# Allegro board 03v3.brd
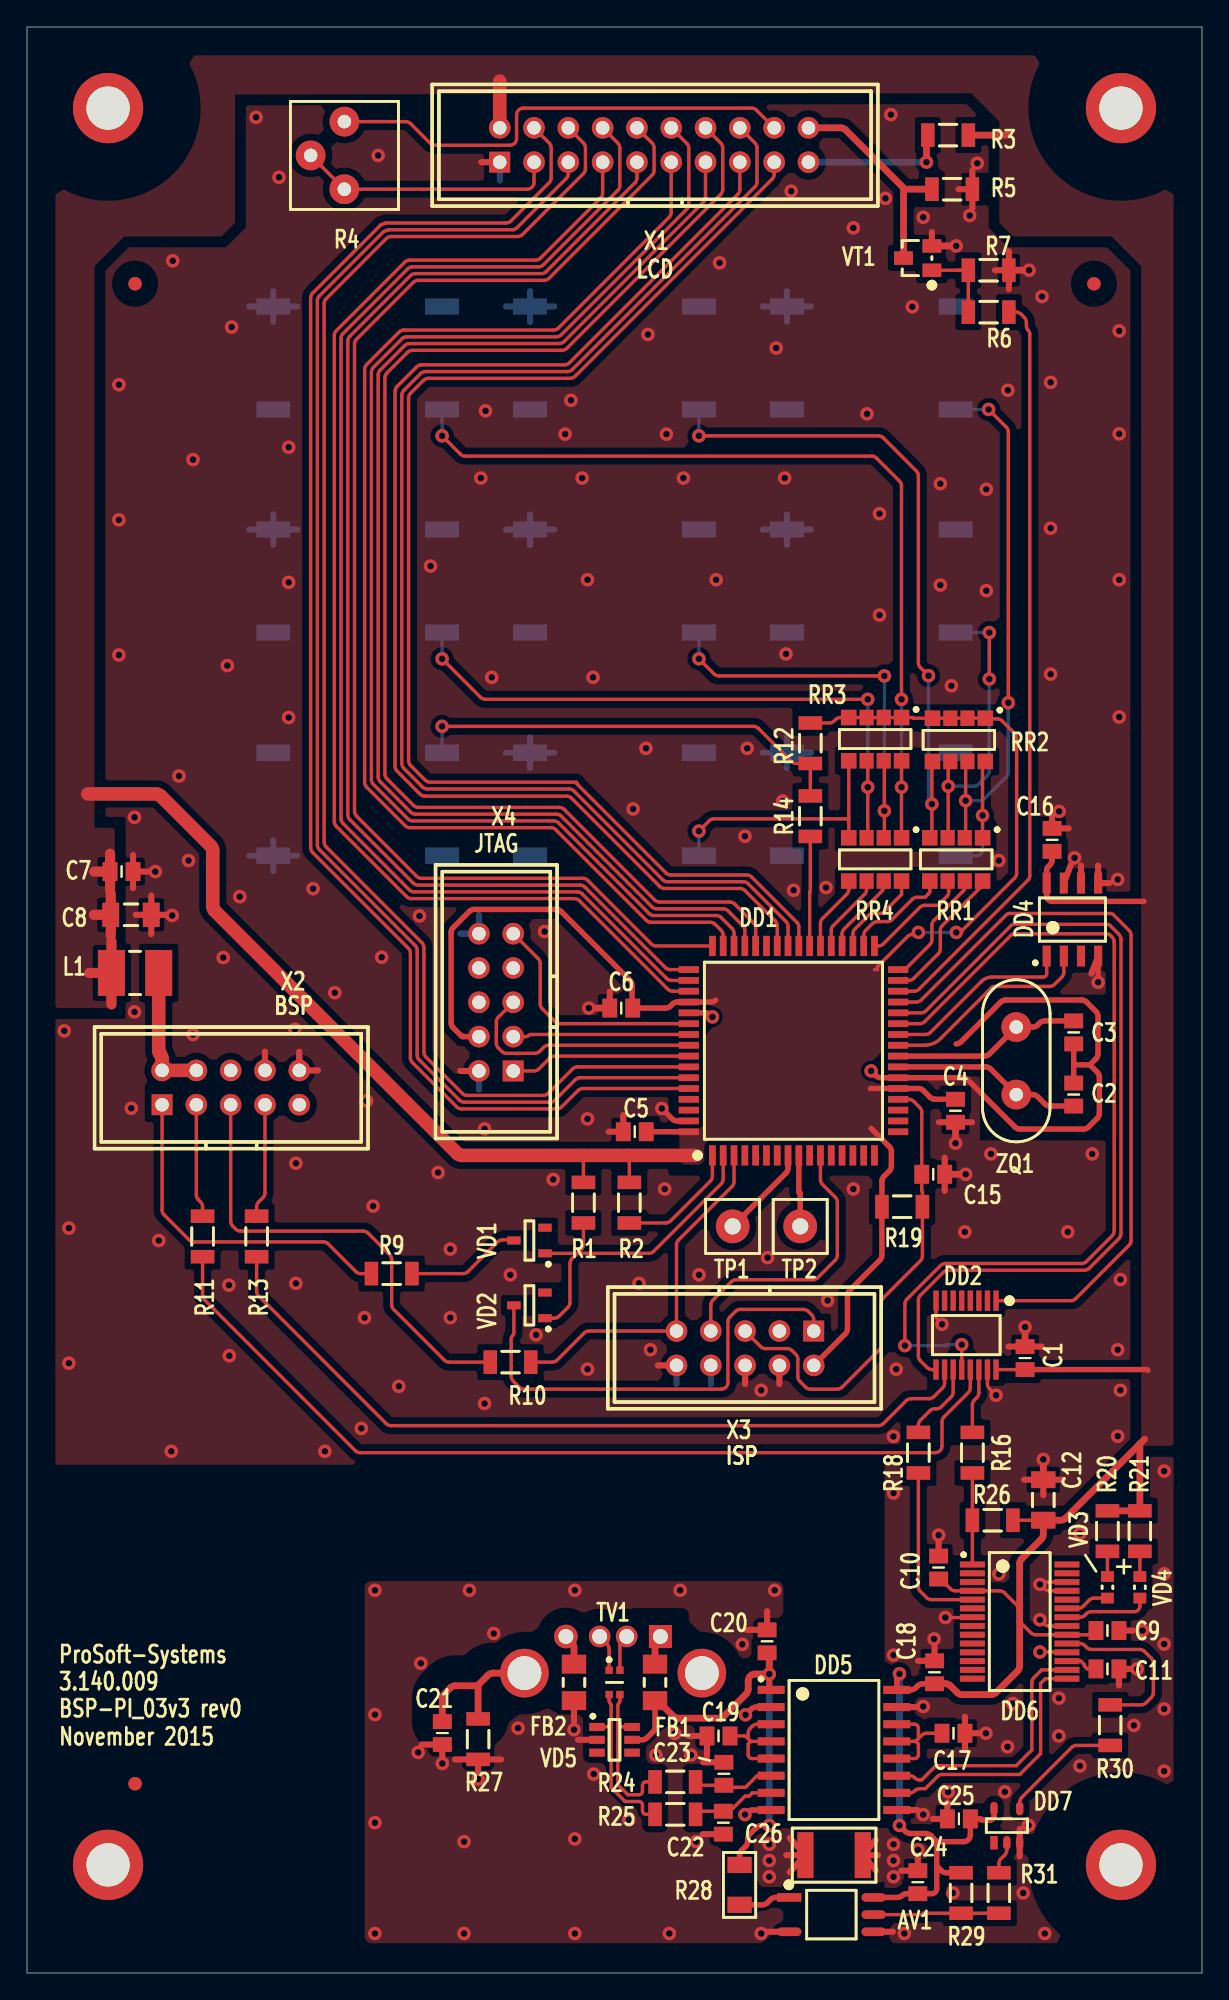
[diagram p0: board, top side]
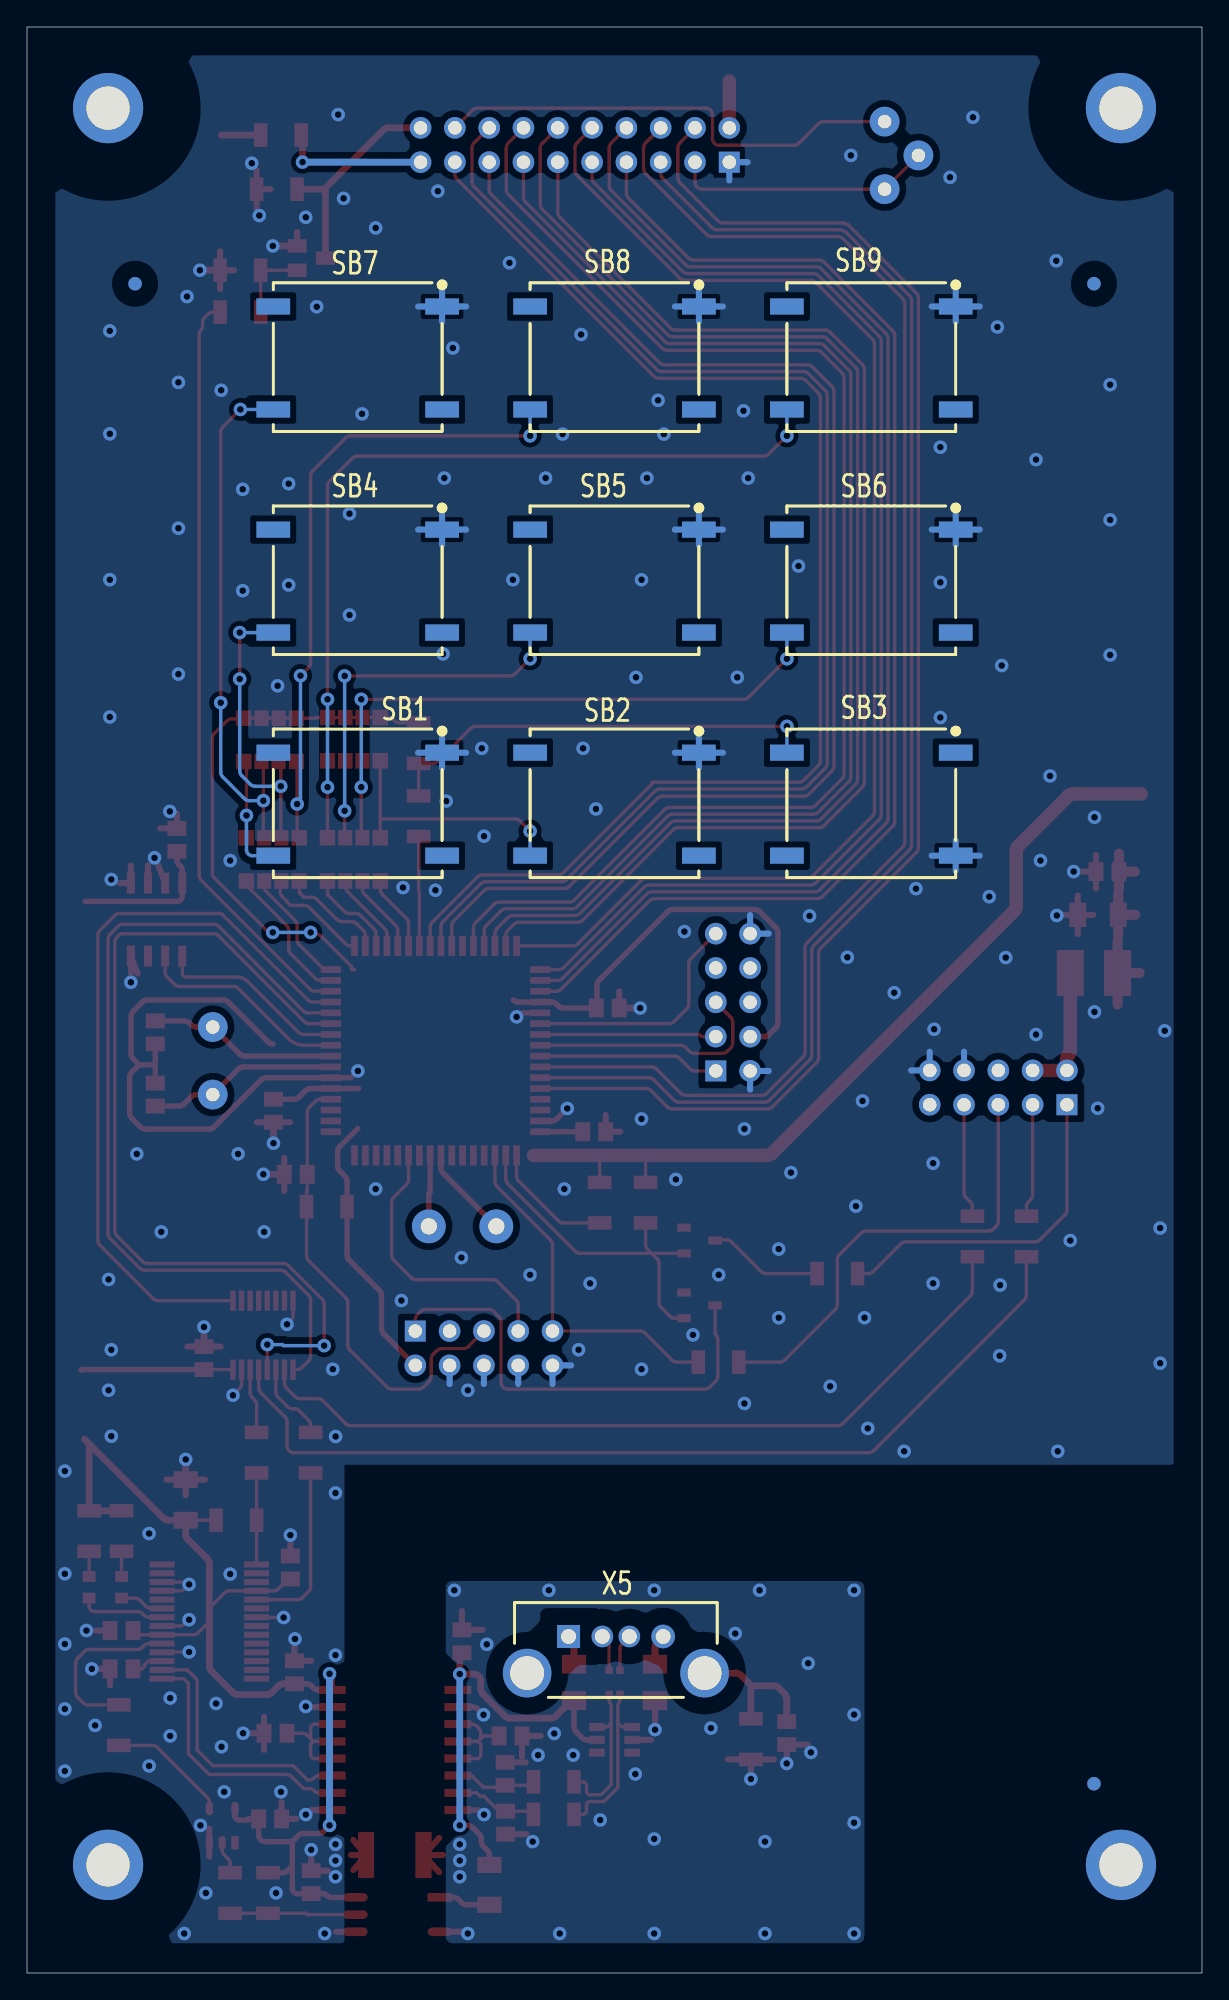
[diagram p1: board, bottom side, seen from below]

Outline 87 x 144 mm; copper layers: TOP, BOTTOM. Coordinates in mm from the lower left corner of the outline.
Outline path: 0,144 0,0 87,0 87,144 0,144

## Design rules (mm)
net group DP1: nets D+ D-
net group DP2: nets N115270 N115278
net group DP3: nets DD+ DD-
net group JTAG[0..3]: nets JTAG.TCK JTAG.TDI JTAG.TDO JTAG.TMS

## Placement (name value [footprint] x y rotation side)
AV1  ACPL-M50L-500E  [SOIC127P700X250-6N]  59.56 4.32 0 top
C1  0,1u  [CAPC2013X95N]  73.9 45.5 90 top
C2  22p  [CAPC2013X70N]  77.5 65 90 top
C3  22p  [CAPC2013X70N]  77.5 69.6 270 top
C4  0,1u  [CAPC2013X95N]  68.75 63.8 270 top
C5  0,1u  [CAPC2013X95N]  45 62.25 180 top
C6  0,1u  [CAPC2013X95N]  44 71.4 180 top
C7  0,1u  [CAPC2013X95N]  7 81.5 0 top
C8  10,0u  [CAPC3216X180N]  7.7 78.3 0 top
C9  0,1u  [CAPC2013X95N]  80 25.34 0 top
C10  0,1u  [CAPC2013X95N]  67.5 30 90 top
C11  0,1u  [CAPC2013X95N]  80 22.5 0 top
C12  10,0u  [CAPC3216X180N]  75.25 35 90 top
C15  0,1u  [CAPC2013X95N]  67.1 59.1 0 top
C16  0,1u  [CAPC2013X95N]  75.9 83.85 90 top
C17  0,1u  [CAPC2013X95N]  68.6 17.74 0 top
C18  0,1u  [CAPC2013X95N]  67.2 22.25 90 top
C19  0,1u  [CAPC2013X95N]  51.2 17.54 180 top
C20  0,1u  [CAPC2013X95N]  54.8 24.54 90 top
C21  4700p  [CAPC2013X70N]  30.75 17.75 90 top
C22  22p  [CAPC2013X70N]  51.56 11.12 90 top
C23  22p  [CAPC2013X70N]  51.6 14.74 270 top
C24  0,1u  [CAPC2013X95N]  65.96 6.72 90 top
C25  0,1u  [CAPC2013X95N]  69 11.4 180 top
C26  470pF  [CAPC4532X120N]  59.76 8.72 0 top
DD1  ATmega128  [TQFP80P1600X1600X120-64]  50.75 60.5 90 top
DD2  IDTQS3257Q  [SOP65P600X172-16]  71.75 49.75 270 top
DD4  TM75  [SOIC127P600X175-8N]  77.41 77.95 90 top
DD5  ADUM4160  [SOIC127P1032X265-16N]  59.75 16.5 0 top
DD6  FT232RL  [SOP65P780X200-28N]  73.5 26 0 top
DD7  SN74LVC1G14DBV  [SOT95P280X112-5N]  72.55 10.9 90 top
FB1  BLM31P  [FB3216X130N]  46.5 21.5 270 top
FB2  BLM31P  [FB3216X130N]  40.5 21.5 270 top
L1  10u  [INDC4532X280N]  8 74 0 top
NOREF  -  [unnamed]  8 14 0 top
NOREF#2  -  [#2]  50.6 20.4 0 top
NOREF#3  -  [#2]  36.2 27.5 0 top
NOREF#4  -  [unnamed#3]  81 138 0 top
NOREF#5  -  [unnamed]  79 125 0 top
NOREF#6  -  [#2]  36.2 20.4 90 top
NOREF#7  -  [#2]  81 8 90 top
NOREF#8  -  [unnamed]  8 125 0 top
NOREF#9  -  [unnamed#3]  6 8 0 top
NOREF#10  -  [unnamed#3]  6 138 0 top
NOREF#11  -  [unnamed#3]  81 8 0 top
NOREF#12  -  [unnamed]  79 125 180 bottom
NOREF#13  -  [unnamed]  8 14 180 bottom
NOREF#14  -  [unnamed]  8 125 180 bottom
R1  10k  [RESC3116X65N]  41.2 57 90 top
R2  10k  [RESC3116X65N]  44.6 57 90 top
R3  4,7  [RESC3116X65N]  68.2 136 0 top
R4  10k  [TRIM_PVC6A]  23.5 137 180 top
R5  0  [RESC3116X65N]  68.5 132 0 top
R6  100  [RESC3116X65N]  71.2 122.9 0 top
R7  10k  [RESC3116X65N]  71.2 126 180 top
R9  100  [RESC3116X65N]  27 51.75 180 top
R10  100  [RESC3116X65N]  35.8 45.2 180 top
R11  100  [RESC3116X65N]  13 54.5 90 top
R12  10k  [RESC3116X65N]  58 91 270 top
R13  100  [RESC3116X65N]  17 54.5 90 top
R14  100  [RESC3116X65N]  58 85.6 270 top
R16  100  [RESC3116X65N]  70 38.5 90 top
R18  100  [RESC3116X65N]  66 38.5 90 top
R19  10k  [RESC3116X65N]  64.8 56.7 180 top
R20  330  [RESC3116X65N]  80 32.7 90 top
R21  330  [RESC3116X65N]  82.4 32.7 90 top
R24  24  [RESC3116X65N]  48 14.14 0 top
R25  24  [RESC3116X65N]  48 11.74 0 top
R26  10k  [RESC3116X65N]  71.5 33.5 0 top
R27  1M  [RESC3116X65N]  33.4 17.3 270 top
R28  1k  [RESC3216X50N]  52.76 6.52 270 top
R29  10k  [RESC3116X65N]  69.16 5.92 90 top
R30  100  [RESC3116X65N]  80.2 18.34 90 top
R31  100  [RESC3116X65N]  71.96 5.92 90 top
RR1  100  [RESCAX127P320X508X70-8N]  68.8 82.4 270 top
RR2  10k  [RESCAX127P320X508X70-8N]  69 91.25 270 top
RR3  10k  [RESCAX127P320X508X70-8N]  62.8 91.3 270 top
RR4  100  [RESCAX127P320X508X70-8N]  62.8 82.4 270 top
SB1  3ESH9-15  [SW_3ES]  62.52 86.55 180 bottom
SB2  3ESH9-15  [SW_3ES]  43.5 86.55 180 bottom
SB3  3ESH9-15  [SW_3ES]  24.48 86.55 180 bottom
SB4  3ESH9-15  [SW_3ES]  62.52 103.06 180 bottom
SB5  3ESH9-15  [SW_3ES]  43.5 103.06 180 bottom
SB6  3ESH9-15  [SW_3ES]  24.48 103.06 180 bottom
SB7  3ESH9-15  [SW_3ES]  62.52 119.57 180 bottom
SB8  3ESH9-15  [SW_3ES]  43.5 119.57 180 bottom
SB9  3ESH9-15  [SW_3ES]  24.48 119.57 180 bottom
TP1  TP1_5mm  [P1_5MM]  52.25 55.25 0 top
TP2  TP1_5mm  [P1_5MM]  57.25 55.25 0 top
TV1  DLW21S  [DFN200X120X140-4RN]  43.5 21.5 270 top
VD1  BAT54S  [SOT95P230X110-3N]  37.2 54.2 180 top
VD2  BAT54S  [SOT95P230X110-3N]  37.2 49.4 180 top
VD3  green  [LEDC1608X110N]  80 28.54 90 top
VD4  green  [LEDC1608X110N]  82.4 28.54 90 top
VD5  NUP2201MR6  [SOP95P275X110-6N]  43.5 17.25 0 top
VT1  IRLML2803  [SOT95P245X110-3]  67 126 90 top
X1  LCD  [IDC_20M]  46.43 135.27 90 top
X2  BSP  [IDC_10M]  15.08 65.52 90 top
X3  ISP  [IDC_10M]  53.17 46.23 270 top
X4  IDC-10M  [IDC_10M]  34.73 71.83 180 top
X5  USBA  [CON_USB_A_VERT]  43.4 23.9 90 bottom
ZQ1  16.0 MHz  [HC_49]  73.25 65 0 top

## Library data of the parts
AV1 = ACPL-M50L
C1-C12 C15-C25 = CAP_NP
C26 = CAPACITOR
DD1 = ATmega128-16AU_0
DD2 = IDTQS3257Q_0
DD4 = TMP75
DD5 = ADuM4160_RW16
DD6 = FT232_SSOP28
DD7 = SN74LVC1G14_v1
FB1 FB2 = FERRITE
L1 = INDUCTOR
R1-R3 R5-R7 R9-R14 R16 R18-R21 R24-R27 R29-R31 = RES_0.25W
R4 = RES_P
R28 = R_0.25W
RR1-RR4 = RES_ARRAY_4
SB1-SB9 = BUTTON_3ESH9
TP1 TP2 = TP1_5mm
TV1 = COMMON_CHOKE
VD1 VD2 = DIODE_DUAL_1
VD3 VD4 = DIODE_LED
VD5 = TVS_ARRAY_NUP2201
VT1 = IRLML2803
X1 = CON_20
X2-X4 = CON_10
X5 = CON_6
ZQ1 = KX-3H_16MHz

## Footprints (pads in the part's own frame, mm; a bottom-side part is the same pattern mirrored in y, then rotated)
CAPC2013X70N
  rect 1.1x1.4 smd: 1(-0.85,0) 2(0.85,0)
CAPC2013X95N
  rect 1.1x1.4 smd: 1(-0.85,0) 2(0.85,0)
CAPC3216X180N
  rect 1.25x1.8 smd: 1(-1.5,0) 2(1.5,0)
CAPC4532X120N
  rect 1.2x3.4 smd: 1(-2.125,0) 2(2.125,0)
CON_USB_A_VERT
  rect 1.7x1.7 hole 1.1: 1(1,3.5)
  round 1.6 hole 1.1: 2(1,1) 3(1,-1)
  round 1.75 hole 1.1: 4(1,-3.5)
  round 3.6 hole 2.5: 5(-1.71,-6.57) 6(-1.71,6.57)
DFN200X120X140-4RN
  rect 0.55x0.55 smd: 1(-0.9,-0.4) 2(0.9,-0.4) 3(0.9,0.4) 4(-0.9,0.4)
FB3216X130N
  rect 1.4x1.8 smd: 1(-1.35,0) 2(1.35,0)
HC_49
  round 2.2 hole 1: 1(0,0) 2(0,5)
IDC_10M
  rect 1.55x1.55 hole 1: 1(-1.27,5.08)
  round 1.6 hole 1: 2(1.27,5.08) 3(-1.27,2.54) 4(1.27,2.54) 5(-1.27,0) 6(1.27,0) 7(-1.27,-2.54) 8(1.27,-2.54) 9(-1.27,-5.08) 10(1.27,-5.08)
IDC_20M
  rect 1.55x1.55 hole 1: 1(-1.27,11.43)
  round 1.6 hole 1: 2(1.27,11.43) 3(-1.27,8.89) 4(1.27,8.89) 5(-1.27,6.35) 6(1.27,6.35) 7(-1.27,3.81) 8(1.27,3.81) 9(-1.27,1.27) 10(1.27,1.27) 11(-1.27,-1.27) 12(1.27,-1.27) 13(-1.27,-3.81) 14(1.27,-3.81) 15(-1.27,-6.35) 16(1.27,-6.35) 17(-1.27,-8.89) 18(1.27,-8.89) 19(-1.27,-11.43) 20(1.27,-11.43)
INDC4532X280N
  rect 2x3.4 smd: 1(-1.75,0) 2(1.75,0)
LEDC1608X110N
  rect 0.8x0.95 smd: A(0.8,0) C(-0.8,0)
P1_5MM
  round 2.5 hole 1.2: 1(0,0)
RESC3116X65N
  rect 1x1.75 smd: 1(-1.5,0) 2(1.5,0)
RESC3216X50N
  rect 1.2x1.8 smd: 1(-1.475,0) 2(1.475,0)
RESCAX127P320X508X70-8N
  rect 1.15x1.15 smd: 1(-1.6,1.955) 4(-1.6,-1.955) 5(1.6,-1.955) 8(1.6,1.955)
  rect 1.15x1.05 smd: 2(-1.6,0.635) 3(-1.6,-0.635) 6(1.6,-0.635) 7(1.6,0.635)
SOIC127P600X175-8N
  rect 1.55x0.6 smd: 1(-2.7,1.905) 2(-2.7,0.635) 3(-2.7,-0.635) 4(-2.7,-1.905) 5(2.7,-1.905) 6(2.7,-0.635) 7(2.7,0.635) 8(2.7,1.905)
SOIC127P700X250-6N
  rect 1.8x0.64 smd: 1(-3.125,1.27)
  oval 1.8x0.64 smd: 3(-3.125,-1.27) 4(3.125,-1.27) 5(3.125,0) 6(3.125,1.27)
SOIC127P1032X265-16N
  rect 2x0.6 smd: 1(-4.65,4.445) 2(-4.65,3.175) 3(-4.65,1.905) 4(-4.65,0.635) 5(-4.65,-0.635) 6(-4.65,-1.905) 7(-4.65,-3.175) 8(-4.65,-4.445) 9(4.65,-4.445) 10(4.65,-3.175) 11(4.65,-1.905) 12(4.65,-0.635) 13(4.65,0.635) 14(4.65,1.905) 15(4.65,3.175) 16(4.65,4.445)
SOP65P600X172-16
  rect 1.5x0.4 smd: 1(0,0) 2(0,-0.635) 3(0,-1.27) 4(0,-1.905) 5(0,-2.54) 6(0,-3.175) 7(0,-3.81) 8(0,-4.445) 9(5.1,-4.445) 10(5.1,-3.81) 11(5.1,-3.175) 12(5.1,-2.54) 13(5.1,-1.905) 14(5.1,-1.27) 15(5.1,-0.635) 16(5.1,0)
SOP65P780X200-28N
  rect 1.85x0.45 smd: 1(-3.5,4.225) 2(-3.5,3.575) 3(-3.5,2.925) 4(-3.5,2.275) 5(-3.5,1.625) 6(-3.5,0.975) 7(-3.5,0.325) 8(-3.5,-0.325) 9(-3.5,-0.975) 10(-3.5,-1.625) 11(-3.5,-2.275) 12(-3.5,-2.925) 13(-3.5,-3.575) 14(-3.5,-4.225) 15(3.5,-4.225) 16(3.5,-3.575) 17(3.5,-2.925) 18(3.5,-2.275) 19(3.5,-1.625) 20(3.5,-0.975) 21(3.5,-0.325) 22(3.5,0.325) 23(3.5,0.975) 24(3.5,1.625) 25(3.5,2.275) 26(3.5,2.925) 27(3.5,3.575) 28(3.5,4.225)
SOP95P275X110-6N
  rect 1.15x0.6 smd: 1(-1.3,0.95) 2(-1.3,0) 3(-1.3,-0.95) 4(1.3,-0.95) 5(1.3,0) 6(1.3,0.95)
SOT95P230X110-3N
  rect 1x0.6 smd: 1(-1.15,0.95) 2(-1.15,-0.95) 3(1.15,0)
SOT95P245X110-3
  rect 1x1.4 smd: 1(0,0) 2(1.8,0) 3(0.9,2.1)
SOT95P280X112-5N
  rect 1x0.55 smd: 1(-1.262,0.95)
  oval 1x0.55 smd: 2(-1.262,0) 3(-1.262,-0.95) 4(1.262,-0.95) 5(1.262,0.95)
SW_3ES
  rect 2.5x1.2 smd: 1(6.25,3.75) 2(-6.25,3.75) 3(6.25,-3.87) 4(-6.25,-3.87)
TQFP80P1600X1600X120-64
  rect 1.5x0.5 smd: 1(0,0) 2(0,-0.8) 3(0,-1.6) 4(0,-2.4) 5(0,-3.2) 6(0,-4) 7(0,-4.8) 8(0,-5.6) 9(0,-6.4) 10(0,-7.2) 11(0,-8) 12(0,-8.8) 13(0,-9.6) 14(0,-10.4) 15(0,-11.2) 16(0,-12) 33(15.5,-12) 34(15.5,-11.2) 35(15.5,-10.4) 36(15.5,-9.6) 37(15.5,-8.8) 38(15.5,-8) 39(15.5,-7.2) 40(15.5,-6.4) 41(15.5,-5.6) 42(15.5,-4.8) 43(15.5,-4) 44(15.5,-3.2) 45(15.5,-2.4) 46(15.5,-1.6) 47(15.5,-0.8) 48(15.5,0)
  rect 0.5x1.5 smd: 17(1.75,-13.75) 18(2.55,-13.75) 19(3.35,-13.75) 20(4.15,-13.75) 21(4.95,-13.75) 22(5.75,-13.75) 23(6.55,-13.75) 24(7.35,-13.75) 25(8.15,-13.75) 26(8.95,-13.75) 27(9.75,-13.75) 28(10.55,-13.75) 29(11.35,-13.75) 30(12.15,-13.75) 31(12.95,-13.75) 32(13.75,-13.75) 49(13.75,1.75) 50(12.95,1.75) 51(12.15,1.75) 52(11.35,1.75) 53(10.55,1.75) 54(9.75,1.75) 55(8.95,1.75) 56(8.15,1.75) 57(7.35,1.75) 58(6.55,1.75) 59(5.75,1.75) 60(4.95,1.75) 61(4.15,1.75) 62(3.35,1.75) 63(2.55,1.75) 64(1.75,1.75)
TRIM_PVC6A
  round 2.2 hole 1: 1(0,0) 2(2.5,2.5) 3(0,5)
unnamed
  round 1 smd: (0,0)
unnamed#3
  round 5.2 hole 3.2: 1(0,0)

## Nets
GND: AV1.4(GND) C1.2 C2.2 C3.2 C4.2 C5.2 C6.2 C7.2 C8.2 C9.2 C10.2 C11.2 C12.2 C15.2 C16.2 C17.2 C18.2 C24.2 C25.2 C26.2 DD1.22(GND#0) DD1.53(GND#1) DD1.63(GNDA) DD2.8(GND) DD2.15(E\) DD4.4(GND) DD4.5(A2) DD4.6(A1) DD4.7(A0) DD5.9(GND2#2) DD5.15(GND2#1) DD6.7(GND#1) DD6.18(GND#2) DD6.21(GND#3) DD6.25(AGND) DD6.26(TEST) DD7.3(GND) R5.2 R7.1 SB1.1 SB2.1 SB3.3(4) SB4.1 SB5.1 SB6.1 SB7.1 SB8.1 SB9.1 VT1.2(S) X1.1 X2.8 X2.10 X3.4 X3.6 X3.8 X3.10 X4.2 X4.10
GNDE: AV1.3(CATHODE) C19.2 C20.2 C21.1 C22.1 C23.1 C26.1 DD5.2(GND1#1) DD5.8(GND1#2) FB2.2 R27.2 VD5.2(VN)
#RES: C15.1 DD1.20(R\E\S\) R19.1 X3.5
+5B: AV1.6(VCC) C1.1 C4.1 C5.1 C6.1 C7.1 C8.1 C9.1 C10.1 C12.1 C16.1 C18.1 C24.1 C25.1 DD1.21(+5B#0) DD1.52(+5B#1) DD1.64(+5BA) DD2.16(VCC) DD4.8(VCC) DD5.16(VBUS2) DD6.4(VCCIO) DD6.20(VCC) DD7.5(VCC) L1.1 R1.2 R2.2 R3.2 R12.1 R19.2 R20.2 R21.2 R26.2 R29.2 RR2.1 RR2.2 RR2.3 RR2.4 RR3.1 RR3.2 RR3.3 RR3.4 X1.2 X3.2 X4.4
+5BE: C20.1 DD5.1(VBUS1) FB1.2 R28.1 VD5.5(VP)
CS1: DD1.42(PC7/A15) X1.15
CS2: DD1.41(PC6/A14) X1.16
D+: R25.1 TV1.2 VD5.1(I/01)
D-: R24.1 TV1.3 VD5.6(I/O2)
D_I: DD1.60(PF1/ADC1) X1.4
DB0: DD1.51(PA0/AD0) X1.7
DB1: DD1.50(PA1/AD1) X1.8
DB2: DD1.49(PA2/AD2) X1.9
DB3: DD1.48(PA3/AD3) X1.10
DB4: DD1.47(PA4/AD4) X1.11
DB5: DD1.46(PA5/AD5) X1.12
DB6: DD1.45(PA6/AD6) X1.13
DB7: DD1.44(PA7/AD7) X1.14
DD+: DD5.10(DD+) DD6.15(USBDP)
DD-: DD5.11(DD-) DD6.16(USBDM)
E: DD1.58(PF3/ADC3) X1.6
JTAG.TCK: DD1.57(PF4/TCK) X4.1
JTAG.TDI: DD1.54(PF7/TDI) X4.9
JTAG.TDO: DD1.55(PF6/TDO) X4.3
JTAG.TMS: DD1.56(PF5/TMS) X4.5
K1: RR1.1 RR2.8 SB1.4
K2: RR1.2 RR2.7 SB7.4
K3: RR1.3 RR2.6 SB4.4
K4: RR1.4 RR2.5 SB8.4
K5: RR3.8 RR4.1 SB9.4
K6: RR3.7 RR4.2 SB5.4
K7: RR3.6 RR4.3 SB6.4
K8: RR3.5 RR4.4 SB2.4
K9: R12.2 R14.1 SB3.2(1)
KEY1: DD1.31(PD6/T1) RR1.8
KEY2: DD1.32(PD7/T2) RR1.7
KEY3: DD1.33(PG0/W\R\) RR1.6
KEY4: DD1.34(PG1/R\D\) RR1.5
KEY5: DD1.35(PC0/A8) RR4.8
KEY6: DD1.36(PC1/A9) RR4.7
KEY7: DD1.37(PC2/A10) RR4.6
KEY8: DD1.38(PC3/A11) RR4.5
KEY9: DD1.39(PC4/A12) R14.2
LED: DD1.30(PD5/XCK1) R6.2
LRST: DD1.40(PC5/A13) X1.17
MUX: DD1.29(ICP1/PD4) DD2.1(S)
R_W: DD1.59(PF2/ADC2) X1.5
RXD0/MOSI: DD1.2(RXD0/PE0) R1.1 VD1.1(A) VD2.1(A)
RXD1: DD1.27(RXD1/PD2) DD2.12(OUTD)
RXD_LS: DD2.13(IN1D) R11.1
SCK: DD1.11(SCK/PB1) X3.7
SCL: DD1.25(SCL/PD0) DD4.2(SCL)
SDA: DD1.26(SDA/PD1) DD4.1(SDA)
TXD0/MISO: DD1.3(TXD0/PE1) R10.1 X3.9
TXD1: DD1.28(TXD1/PD3) DD2.9(OUTC)
TXD_LS: DD2.10(IN1C) R13.1
N00957: DD1.1(P\E\N\) R2.1
N01084: DD1.8(T3/PE6) TP1.1
N01088: DD1.9(ICP3/PE7) TP2.1
N01310: C3.1 DD1.24(XTAL1) ZQ1.2
N01324: C2.1 DD1.23(XTAL2) ZQ1.1
N93659: R4.2(MID) R4.3(OUT) X1.3
N93746: R4.1(IN) X1.18
N93998: R5.1 VT1.3(D) X1.20
N94028: R6.1 R7.2 VT1.1(G)
N94170: R3.1 X1.19
N100167: DD2.11(IN0C) R18.2
N100189: DD2.14(IN0D) R16.2
N115270: C22.2 DD5.7(UD+) R25.2
N115278: C23.2 DD5.6(UD-) R24.2
N115358: FB1.1 X5.1
N115370: FB2.1 X5.4
N115422: TV1.1 X5.3
N115426: TV1.4 X5.2
N115490: C17.1 DD5.12(PIN) DD5.13(SPD) DD5.14(VDD2)
N115638: C19.1 DD5.3(VDD1) DD5.4(PDEN) DD5.5(SPU)
N116441: DD6.1(TXD) R16.1 R26.1
N116513: C11.1 DD6.17(3V3OUT)
N116637: DD6.5(RXD) R18.1
N116697: DD6.22(CBUS1) VD4.C
N116729: DD6.23(CBUS0) VD3.C
N116753: R20.1 VD3.A
N116773: R21.1 VD4.A
N134788: C21.2 R27.1 X5.5
N164718: AV1.1(ANODE) R28.2
N166181: DD7.4(OUT) R30.1
N168079: DD7.2(IN1) R31.2
N169875: DD6.19(R\E\S\E\T\) R30.2
N170831: AV1.5(VO) R29.1 R31.1
N172116: VD2.3(M) X3.1
N172976: R9.2 X2.1
N172980: L1.2 X2.2 X2.4
N173418: R10.2 X2.5
N173516: R11.2 X2.3
N173528: R13.2 X2.7
N177903: R9.1 VD1.3(M)

Pads without a net: DD1 4 5 6 7 10 12 13 14 15 16 17 18 19 43 61 62; DD2 2 3 4 5 6 7; DD4 3; DD6 2 3 6 8 9 10 11 12 13 14 24 27 28; DD7 1; NOREF#4 1; NOREF#9 1; NOREF#10 1; NOREF#11 1; SB1 2 3; SB2 2 3; SB3 1 4; SB4 2 3; SB5 2 3; SB6 2 3; SB7 2 3; SB8 2 3; SB9 2 3; VD1 2; VD2 2; VD5 3 4; X2 6 9; X3 3; X4 6 7 8; X5 6

## Via types
v1: diameter 1, hole 0.5, TOP to BOTTOM, 238 vias

## Routing (per net, layer and track width the routed paths; a pad name or vN(x,y) marks a point on that pad's centre or on a via; arc(x,y) is an arc through that point)
GND: length 224
  TOP w0.25: v1(75,23.75) 76.97,23.75 DD6.18 ; v1(68,26.3) 69.97,26.3 DD6.7 ; DD6.21 75.67,25.68 arc(75.48,25.72) 75.32,25.82 v1(75,26.14) ; v1(67.75,48) 67.45,48.3 arc(67.34,48.46) 67.3,48.65 DD2.8 ; DD6.26 75.38,28.93 arc(75.19,28.89) 75.03,28.78 v1(75,28.75) 75.33,28.42 arc(75.49,28.32) 75.68,28.28 DD6.25 ; v1(71.75,42.75) 71.26,43.24 arc(71.15,43.4) 71.11,43.59 DD2.15
  TOP w0.4: v1(62.5,66.75) 62.85,66.4 arc(63.02,66.29) 63.21,66.25 DD1.22 69.29,66.25 arc(69.48,66.21) 69.65,66.1 73.16,62.59 arc(73.32,62.49) 73.51,62.45 78.24,62.45 arc(78.43,62.49) 78.59,62.59 79.25,63.26 arc(79.36,63.42) 79.4,63.61 79.4,66.3 arc(79.36,66.49) 79.25,66.65 78.7,67.2 ; DD1.53 50.24,71.05 arc(50.43,71.01) 50.6,70.9 v1(50.75,70.75) ; 78.7,67.2 79.15,67.66 arc(79.26,67.82) 79.3,68.01 79.3,70.8 arc(79.26,70.99) 79.15,71.15 78.45,71.85 arc(78.29,71.96) 78.1,72 72.46,72 arc(72.27,71.96) 72.1,71.85 69.15,68.9 arc(68.98,68.79) 68.79,68.75 ; 78.7,67.2 77.5,67.2 ; 77.5,65.85 77.5,67.2 ; 77.5,67.2 C3.2 ; DD4.4 v1(79.31,73.31) ; DD1.63 48.13,63.05 arc(47.94,63.09) 47.78,63.2 v1(47,63.97)
  TOP w0.45: 53.17,43.58 X3.6 ; R7.1 72.7,127.41 ; R7.1 71.67,126 ; R7.1 72.7,124.6 ; 67.95,57.87 C15.2 67.95,60.33 ; 61.88,8.72 62.84,9.83 ; 61.88,8.72 62.84,7.61 ; 61.88,8.72 63.01,8.72 ; 65.97,23.1 C18.2 67.2,24.18 ; 68.15,12.63 C25.2 67.07,11.4 ; 72.67,46.35 C1.2 75.13,46.35 ; X2.8 17.62,68.17 ; 33.65,134 X1.1 ; 80.14,80.65 DD4.5 79.31,81.95 ; 46.71,44.96 X3.10 ; 55.71,43.58 X3.4 ; 70,130.6 R5.2 ; R5.2 68.97,132 ; R5.2 70,133.4 ; DD4.7 77.28,81.95 ; VT1.2 67,128.83 ; 73.5,8.61 DD7.3 73.5,10.67 ; 64.73,7.57 C24.2 65.96,8.65 ; 62.69,3.05 64.11,3.05 ; C6.2 43.15,72.63 ; 32.08,66.75 X4.2 ; 73.82,36.5 C12.2 ; C12.2 76.68,36.5 ; C12.2 75.25,35.35 ; 43.07,62.25 C5.2 44.15,63.48 ; C8.2 10.35,78.3 ; C8.2 8.05,78.3 ; C8.2 9.2,79.73 ; C8.2 9.2,76.87 ; DD5.9 65.93,12.06 ; 7.85,80.27 C7.2 ; C7.2 8.93,81.5 ; C7.2 7.85,82.73 ; 69.98,62.95 C4.2 67.52,62.95 ; DD4.6 78.04,81.95 ; 77.13,84.7 C16.2 75.9,85.78 ; 81.93,22.5 C11.2 80.85,21.27 ; C9.2 81.93,25.34 ; C17.2 69.45,18.97 ; C17.2 70.53,17.74 ; C17.2 69.45,16.51 ; 20.16,68.17 X2.10 21.54,66.79 ; DD5.15 65.93,19.68 ; C10.2 67.5,31.93 ; 78.81,73.95 DD4.4
  TOP w0.5: C4.2 v1(68.75,61.4) ; 10.7,78.3 v1(10.75,78.25) ; C1.2 v1(73.9,47.8) ; v1(68.8,127.8) VT1.2 ; R7.1 v1(74.2,126) ; C12.2 v1(75.25,38) ; C15.2 v1(69.5,59.1) ; C6.2 v1(41.6,71.4)
  BOTTOM w0.45: 21.54,66.79 X2.10 20.16,68.17 ; 33.46,65.37 X4.2 32.08,66.75 ; SB3.3 20.01,82.68 ; SB3.3 18.23,83.81 ; SB3.3 18.23,81.55 ; SB3.3 16.45,82.68 ; 54.49,123.32 SB7.1 ; SB7.1 56.27,124.45 ; SB7.1 56.27,122.19 ; SB7.1 58.05,123.32 ; 56.27,89.17 SB1.1 ; SB1.1 58.05,90.3 ; SB1.1 54.49,90.3 ; SB1.1 56.27,91.43 ; 32.08,76.91 X4.10 33.46,78.29 ; 48.09,43.58 X3.10 46.71,44.96 ; 35.47,106.81 SB5.1 ; SB5.1 37.25,107.94 ; SB5.1 37.25,105.68 ; SB5.1 39.03,106.81 ; 37.25,89.17 SB2.1 ; SB2.1 39.03,90.3 ; SB2.1 37.25,91.43 ; SB2.1 35.47,90.3 ; 33.65,134 X1.1 35,132.65 ; SB4.1 56.27,107.94 ; SB4.1 54.49,106.81 ; SB4.1 56.27,105.68 ; SB4.1 58.05,106.81 ; 18.23,105.68 SB6.1 ; SB6.1 16.45,106.81 ; SB6.1 20.01,106.81 ; SB6.1 18.23,107.94 ; 53.17,43.58 X3.6 ; 50.63,43.58 X3.8 ; SB9.1 20.01,123.32 ; SB9.1 16.45,123.32 ; SB9.1 18.23,124.45 ; SB9.1 18.23,122.19 ; X2.8 17.62,68.17 ; SB8.1 37.25,124.45 ; SB8.1 37.25,122.19 ; SB8.1 35.47,123.32 ; SB8.1 39.03,123.32 ; 55.71,43.58 X3.4
  vias: v1(2.76,69.72) v1(3.1,55.12) v1(3.1,45.12) v1(6.8,117.53) v1(6.8,107.53) v1(6.8,97.53) v1(7.72,63.99) v1(7.96,85.52) v1(7.96,71.12) v1(9.5,81.5) v1(9.75,54.2) v1(10.68,38.6) v1(10.79,126.7) v1(11.25,88.58) v1(11.96,82.32) v1(12.29,111.99) v1(12.29,69.44) v1(14.53,75.14) v1(14.83,96.75) v1(14.95,50.9) v1(14.98,45.67) v1(15.15,121.8) v1(15.75,79.65) v1(16.96,137.32) v1(18.65,132.88) v1(19.37,112.91) v1(19.37,102.91) v1(19.37,92.91) v1(19.83,69.84) v1(19.91,59.92) v1(19.91,51.03) v1(21.18,80.24) v1(22.05,38.6) v1(22.79,72.54) v1(24.75,40.3) v1(24.99,48.49) v1(25.14,64.53) v1(25.62,56.75) v1(26,134.5) v1(26.26,75.16) v1(27.53,43.41) v1(29.06,78.22) v1(29.88,104.11) v1(30.44,59.23) v1(31.34,53.57) v1(31.34,48.49) v1(33.6,110.62) v1(33.88,62.46) v1(33.88,42.14) v1(33.95,115.6) v1(34.41,95.88) v1(35.78,51.67) v1(37.69,47.22) v1(38.33,77.06) v1(38.96,58.72) v1(39.84,113.88) v1(40.27,116.38) v1(41.1,110.62) v1(41.5,103.1) v1(41.5,63.2) v1(41.5,44.68) v1(41.91,95.88) v1(44.88,86.14) v1(45.31,51.03) v1(45.83,90.62) v1(45.97,121.25) v1(46.16,46.12) v1(47.22,58.02) v1(47.34,113.88) v1(48.6,110.62) v1(49.75,51.67) v1(51.02,103.1) v1(51.28,126.55) v1(53.16,84.12) v1(53.33,90.62) v1(54.36,43.12) v1(54.84,52.94) v1(55.47,120.25) v1(55.96,86.72) v1(56.1,110.62) v1(56.2,97.61) v1(56.58,131.85) v1(56.76,80.12) v1(59.16,80.32) v1(59.28,49.76) v1(61.19,129.13) v1(61.19,58.02) v1(62.19,115.38) v1(63.12,107.99) v1(63.12,100.49) v1(63.56,131.32) v1(63.96,137.52) v1(64.15,39.7) v1(64.16,35.52) v1(64.16,23.52) v1(64.16,9.52) v1(64.16,8.32) v1(64.16,7.12) v1(64.36,44.68) v1(64.96,2.92) v1(65.55,123.3) v1(65.96,9.12) v1(66.36,129.92) v1(66.36,19.72) v1(66.36,11.72) v1(67.16,24.72) v1(67.5,32.4) v1(67.63,110.21) v1(67.63,102.71) v1(68.2,13.4) v1(68.44,95.25) v1(68.56,5.92) v1(69.44,54.84) v1(69.8,130.05) v1(70.36,133.92) v1(71,17.74) v1(71.03,109.79) v1(71.03,102.29) v1(71.37,60.61) v1(71.96,82.32) v1(71.96,29.52) v1(72.4,13.4) v1(72.6,16.74) v1(72.62,117.12) v1(73,19.94) v1(73.76,5.92) v1(74.16,10.92) v1(75.16,124.06) v1(75.36,2.92) v1(75.79,117.71) v1(75.79,106.91) v1(75.79,96.12) v1(76.4,20.34) v1(76.4,17.54) v1(76.42,85.96) v1(77.06,54.84) v1(77.56,82.52) v1(77.96,32.52) v1(77.96,15.32) v1(78.87,60.61) v1(80.76,80.92) v1(80.76,46.12) v1(80.76,39.72) v1(80.87,121.52) v1(80.87,113.9) v1(80.87,103.1) v1(80.87,92.94) v1(80.96,51.32) v1(80.96,43.12) v1(81.96,18.32) v1(82.2,22.5) v1(82.6,25.34) v1(84.2,37.14) v1(84.2,29.54) v1(84.2,24.34) v1(84.2,19.54) v1(84.2,14.94)
GNDE: length 30.2
  TOP w0.4: v1(53.2,19.11) 53.63,19.53 arc(53.79,19.64) 53.98,19.68 DD5.2 ; DD5.8 53.7,12.06 arc(53.51,12.02) 53.35,11.91 v1(53.16,11.72)
  TOP w0.45: 48.97,17.54 C19.2 50.35,16.01 ; 30.75,15.52 C21.1 29.22,16.9 ; 40.8,17.25 VD5.2 ; 50.03,10.27 C22.1 ; 40.5,18.62 FB2.2 ; 53.27,25.39 C20.2 54.8,26.77 ; 31.7,15.8 R27.2 ; R27.2 35.1,15.8 ; R27.2 33.4,14.47 ; 56.21,8.72 C26.1 ; C26.1 56.47,9.98 ; C26.1 56.47,7.46 ; 54.71,3.05 AV1.3 ; 50.07,15.59 C23.1
  vias: v1(25.76,28.32) v1(25.76,19.12) v1(25.76,11.12) v1(25.76,2.92) v1(28.96,16.32) v1(29.16,22.92) v1(30.75,15.5) v1(32.36,9.72) v1(32.36,2.92) v1(32.76,28.32) v1(33.4,14.35) v1(34.56,25.12) v1(36.36,18.12) v1(40.5,18) v1(40.56,28.32) v1(40.56,9.92) v1(40.56,2.92) v1(41.96,14.72) v1(44.56,11.32) v1(46.56,16.12) v1(47.56,2.92) v1(47.96,17.72) v1(48.36,28.32) v1(49.16,16.12) v1(49.56,9.72) v1(52.96,24.32) v1(54.36,2.92) v1(54.96,9.52) v1(54.96,8.32) v1(54.96,7.12) v1(55.36,28.32)
#RES: length 34.9
  TOP w0.25: 53.17,47.5 54.32,46.35 arc(54.49,46.24) 54.68,46.2 56.29,46.2 arc(56.48,46.17) 56.65,46.06 56.93,45.77 arc(57.04,45.61) 57.08,45.42 57.08,44.14 arc(57.11,43.94) 57.22,43.78 57.65,43.35 arc(57.82,43.24) 58.01,43.2 59.99,43.2 arc(60.18,43.24) 60.35,43.35 63.1,46.11 arc(63.21,46.27) 63.25,46.46 63.25,49.6 arc(63.29,49.79) 63.4,49.95 66.15,52.71 arc(66.26,52.87) 66.3,53.06 R19.1 66.3,57.83 66.25,57.88 C15.1 66.25,63.7 arc(66.21,63.89) 66.1,64.05 65.65,64.5 arc(65.49,64.61) 65.3,64.65 DD1.20
+5B: length 296.5
  TOP w0.25: R1.2 41.2,60.5 ; 62.75,74.25 62.97,74.25 62.97,74.47 65.2,76.71 arc(65.37,76.82) 65.56,76.85 65.57,76.85 arc(65.74,76.96) 65.93,77 v1(66,77) ; DD2.16 73.9,44.65 C1.1 ; R26.2 C12.1 ; v1(68.8,77) 68.89,77 arc(69.08,77.04) 69.24,77.15 73.13,81.03 arc(73.24,81.19) 73.28,81.39 73.28,91.37 arc(73.24,91.56) 73.13,91.72 72.2,92.66 arc(72.03,92.77) 71.84,92.8 71,92.8 RR2.1 RR2.3 RR2.4 65.63,92.85 65.58,92.9 RR3.1 RR3.2 RR3.3 RR3.4 60.23,92.9 arc(60.03,92.87) 59.87,92.76 59.76,92.65 arc(59.6,92.54) 59.41,92.5 R12.1 ; C9.1 78.74,25.1 arc(78.62,25.05) 78.49,25.03 DD6.20 74.68,25.03 arc(74.49,25.07) 74.33,25.17 73.5,26 ; 51,72 51,72 ; 73.5,27 72.37,28.13 arc(72.21,28.24) 72.02,28.28 DD6.4 68.73,28.28 arc(68.54,28.32) 68.38,28.42 67.76,29.05 arc(67.64,29.13) C10.1 ; R2.2 44.6,60.26 arc(44.57,60.39) 44.5,60.5
  TOP w0.4: 68.75,64.65 67.23,64.65 arc(67.03,64.69) 66.87,64.8 66.37,65.3 arc(66.21,65.41) 66.02,65.45 DD1.21 62.45,65.45 ; C5.1 47.92,62.25 47.92,62.25 DD1.64 ; 67.36,7.92 67.71,7.57 arc(67.88,7.46) 68.07,7.42 R29.2 ; 67.36,7.92 67.36,9.72 ; 67.36,7.92 67.36,6.24 arc(67.25,5.98) 66.99,5.87 C24.1 65.13,5.87 arc(64.95,5.83) 64.79,5.73 arc(64.64,5.63) 64.45,5.59 62.69,5.59 ; 67.36,9.72 69.36,9.72 arc(69.71,9.86) 69.85,10.21 C25.1 70.6,11.4 70.68,11.32 71.32,11.32 arc(71.52,11.4) 71.6,11.6 DD7.5 ; 67.36,9.72 66.91,10.17 arc(66.74,10.28) 66.55,10.32 65.41,10.32 arc(65.22,10.36) 65.05,10.47 v1(64.6,10.92) ; C18.1 66.31,21.4 arc(66.12,21.36) 65.95,21.25 65.79,21.09 arc(65.63,20.99) 65.44,20.95 DD5.16 64.4,21.73 arc(64.44,21.92) 64.55,22.09 v1(64.6,22.14) ; X4.4 32.33,69.29 32.32,69.3 32.2,69.3 31.55,69.96 arc(31.44,70.12) 31.4,70.31 31.4,77 arc(31.44,77.19) 31.55,77.35 32.75,78.56 arc(32.92,78.67) 33.11,78.7 39.19,78.7 arc(39.38,78.67) 39.55,78.56 44.65,73.45 arc(44.76,73.29) 44.8,73.1 44.8,71.4 C6.1 47.29,71.4 arc(47.48,71.44) 47.64,71.55 47.8,71.7 arc(47.96,71.81) 48.15,71.85 DD1.52 50.64,71.85 arc(50.83,71.89) 51,72 ; C1.1 82.95,44.65 83,44.6 ; C16.1 75.9,82.36 arc(75.86,82.17) 75.75,82.01 75.57,81.83 arc(75.52,81.74) 75.5,81.65 DD4.8 75.5,79.7 arc(75.62,79.42) 75.9,79.3 82.7,79.3 ; X3.2 60.6,47.32 arc(60.71,47.48) 60.75,47.67 60.75,50.15 arc(60.79,50.34) 60.9,50.5 63.15,52.76 arc(63.26,52.92) 63.3,53.11 R19.2 63.3,58.59 arc(63.34,58.78) 63.45,58.95 63.85,59.35 arc(63.96,59.52) 64,59.71 64,60.79 arc(63.96,60.98) 63.85,61.15 62.5,62.5
  TOP w0.5: R20.2 R21.2 82.4,39.15 ; 82.4,39.15 76.9,33.65 arc(76.73,33.54) 76.54,33.5 C12.1 75.25,32.46 arc(75.21,32.27) 75.1,32.11 73.65,30.65 arc(73.54,30.49) 73.5,30.3 73.5,22.71 arc(73.46,22.52) 73.35,22.36 71.74,20.75 arc(71.58,20.64) 71.39,20.6 69.23,20.6 arc(69.04,20.64) 68.88,20.75 68.37,21.25 arc(68.21,21.36) 68.02,21.4 C18.1 ; 82.4,39.15 82.75,39.5 ; R3.2 72.6,136
  TOP w0.75: 4.62,74 L1.1 ; L1.1 6.25,71.67 ; L1.1 6.25,76.33 ; 4.97,81.5 C7.1 ; C7.1 6.15,82.83 ; C7.1 6.15,80.17 ; C8.1 6.2,79.83 ; C8.1 6.2,76.77 ; C8.1 4.95,78.3
  TOP w1: X1.2 35,140 ; 49.5,60.5 32.21,60.5 arc(32.02,60.54) 31.85,60.65 13.9,78.6 arc(13.79,78.77) 13.75,78.96 13.75,83.04 arc(13.71,83.23) 13.6,83.4 9.9,87.1 arc(9.73,87.21) 9.54,87.25 4.5,87.25
  BOTTOM w0.25: v1(66,77) v1(68.8,77)
  BOTTOM w0.5: v1(64.6,22.14) v1(64.6,10.92)
+5BE: length 33.2
  TOP w0.4: v1(54.96,22.12) 54.96,21.29 arc(55,21.1) DD5.1 ; v1(54.96,10.92) 54.37,10.92 arc(54.18,10.88) 54.01,10.77 53.51,10.27 arc(53.4,10.1) 53.36,9.91 53.36,9.73 arc(53.32,9.54) 53.21,9.38 52.91,9.07 arc(52.8,8.91) 52.76,8.72 R28.1 ; FB1.2 46.5,18.21 arc(46.46,18.02) 46.35,17.85 45.9,17.4 arc(45.74,17.29) 45.55,17.25 VD5.5
  TOP w0.5: C20.1 54.81,23.68 arc(54.92,23.51) 54.96,23.32 v1(54.96,22.12) 53.9,22.12 arc(53.55,21.97) 53.4,21.62 53.4,21.01 arc(53.36,20.82) 53.25,20.65 51.6,19 arc(51.44,18.89) 51.25,18.85 48.21,18.85 arc(48.02,18.89) 47.85,19 46.84,20.01 arc(46.68,20.12) FB1.2
  BOTTOM w0.5: v1(54.96,22.12) v1(54.96,10.92)
CS1: length 96.4
  TOP w0.25: X1.15 52.78,131.98 arc(52.74,131.79) 52.63,131.62 40.16,119.15 arc(40,119.04) 39.8,119 29.21,119 arc(29.02,118.97) 28.85,118.86 27.4,117.4 arc(27.29,117.24) 27.25,117.05 27.25,89.29 arc(27.29,89.1) 27.4,88.94 29.11,87.23 arc(29.27,87.12) 29.46,87.08 39.96,87.08 arc(40.15,87.05) 40.32,86.94 46.86,80.4 arc(47.02,80.29) 47.21,80.25 52.79,80.25 arc(52.98,80.22) 53.15,80.11 55.4,77.85 arc(55.51,77.69) 55.55,77.5 DD1.42
CS2: length 99.9
  TOP w0.25: DD1.41 56.35,77.45 arc(56.31,77.64) 56.2,77.8 53.4,80.61 arc(53.23,80.72) 53.04,80.75 47.42,80.75 arc(47.22,80.79) 47.06,80.9 40.49,87.47 arc(40.33,87.58) 40.14,87.62 29.63,87.62 arc(29.44,87.65) 29.28,87.76 27.9,89.15 arc(27.79,89.31) 27.75,89.5 27.75,116.75 arc(27.79,116.95) 27.9,117.11 29.15,118.36 arc(29.31,118.47) 29.5,118.5 40.01,118.5 arc(40.2,118.54) 40.37,118.65 53.9,132.19 arc(54.01,132.35) 54.05,132.54 54.05,135.06 arc(54.01,135.25) 53.9,135.42 X1.16
D+: length 12.5
  TOP w0.25: 43.25,18.45 43.25,13.72 44.28,12.69 45.32,12.69 arc(45.5,12.62) 45.57,12.44 45.57,11.99 arc(45.64,11.81) 45.82,11.74 R25.1 ; 43.25,18.45 43.25,19.79 arc(43.23,19.89) 43.17,19.97 arc(43.12,20.06) 43.1,20.16 TV1.2 ; 43.25,18.45 43.15,18.35 arc(42.98,18.24) 42.79,18.2 VD5.1
D-: length 11.6
  TOP w0.25: 43.75,18.45 43.75,19.79 arc(43.77,19.89) 43.83,19.97 arc(43.88,20.06) 43.9,20.16 TV1.3 ; 43.75,18.45 43.85,18.35 arc(44.02,18.24) 44.21,18.2 VD5.6 ; 43.75,18.45 43.75,13.93 44.49,13.19 45.32,13.19 arc(45.5,13.26) 45.57,13.44 45.57,13.89 arc(45.64,14.07) 45.82,14.14 R24.1
D_I: length 107.9
  TOP w0.25: DD1.60 41.15,65.45 arc(40.96,65.41) 40.8,65.3 39.58,64.09 arc(39.42,63.98) 39.23,63.94 32.17,63.94 arc(31.98,63.98) 31.82,64.09 28.53,67.37 arc(28.43,67.53) 28.39,67.72 28.39,75.47 arc(28.35,75.66) 28.24,75.82 21.15,82.92 arc(21.04,83.08) 21,83.27 21,123.96 arc(21.04,124.15) 21.15,124.31 26.19,129.36 26.46,129.47 arc(26.54,129.49) 26.63,129.5 35.47,129.5 arc(35.66,129.54) 35.83,129.65 38.66,132.48 arc(38.77,132.65) 38.81,132.84 38.81,135.06 arc(38.77,135.25) 38.66,135.42 X1.4
DB0: length 94.1
  TOP w0.25: X1.7 42.62,131.7 arc(42.58,131.51) 42.47,131.35 38.02,126.9 arc(37.86,126.79) 37.67,126.75 28.33,126.75 arc(28.14,126.72) 27.98,126.61 22.9,121.52 arc(22.79,121.36) 22.75,121.17 22.75,85.21 arc(22.79,85.02) 22.9,84.86 28.1,79.65 arc(28.27,79.54) 28.46,79.5 40.54,79.5 arc(40.73,79.47) 40.89,79.36 47.45,72.8 arc(47.62,72.69) 47.81,72.65 DD1.51
DB1: length 96.5
  TOP w0.25: X1.8 43.74,135.42 arc(43.85,135.25) 43.89,135.06 43.89,132.27 arc(43.85,132.08) 43.74,131.91 38.23,126.4 arc(38.07,126.29) 37.88,126.25 28.54,126.25 arc(28.35,126.22) 28.19,126.11 23.4,121.31 arc(23.29,121.15) 23.25,120.96 23.25,85.42 arc(23.29,85.23) 23.4,85.06 28.31,80.15 arc(28.47,80.04) 28.66,80 40.75,80 arc(40.94,79.97) 41.1,79.86 47.36,73.6 arc(47.52,73.49) 47.72,73.45 DD1.50
DB2: length 92.8
  TOP w0.25: DD1.49 47.62,74.25 arc(47.43,74.29) 47.27,74.4 41.31,80.36 arc(41.15,80.47) 40.96,80.5 28.96,80.5 arc(28.77,80.54) 28.6,80.65 23.9,85.36 arc(23.79,85.52) 23.75,85.71 23.75,120.75 arc(23.79,120.95) 23.9,121.11 28.4,125.61 arc(28.56,125.72) 28.75,125.75 38.09,125.75 arc(38.28,125.79) 38.44,125.9 45.01,132.47 arc(45.12,132.64) 45.16,132.83 X1.9
DB3: length 96.6
  TOP w0.25: X1.10 46.28,135.42 arc(46.39,135.25) 46.43,135.06 46.43,133.39 arc(46.39,133.2) 46.28,133.04 38.65,125.4 arc(38.48,125.29) 38.29,125.25 28.96,125.25 arc(28.77,125.22) 28.6,125.11 24.4,120.9 arc(24.29,120.74) 24.25,120.55 24.25,85.96 arc(24.29,85.77) 24.4,85.61 28.85,81.15 arc(29.02,81.04) 29.21,81 41.16,81 arc(41.35,80.97) 41.52,80.86 46.23,76.15 arc(46.39,76.04) 46.58,76 DD1.48
DB4: length 94.1
  TOP w0.25: X1.11 47.7,130.28 arc(47.66,130.09) 47.55,129.93 39.34,121.72 arc(39.18,121.61) 38.99,121.58 27.91,121.58 arc(27.72,121.54) 27.55,121.43 25.15,119.02 arc(25.04,118.86) 25,118.67 25,88.1 arc(25.04,87.91) 25.15,87.75 28,84.9 arc(28.16,84.79) 28.35,84.75 38.79,84.75 arc(38.98,84.72) 39.15,84.61 45.86,77.9 arc(46.02,77.79) 46.21,77.75 50.59,77.75 arc(50.79,77.71) 50.95,77.6 51.4,77.15 arc(51.51,76.99) 51.55,76.8 DD1.47
DB5: length 97.7
  TOP w0.25: DD1.46 52.35,76.94 arc(52.31,77.13) 52.2,77.3 51.4,78.1 arc(51.23,78.21) 51.04,78.25 46.42,78.25 arc(46.23,78.29) 46.06,78.4 39.35,85.11 arc(39.19,85.22) 39,85.25 28.56,85.25 arc(28.37,85.29) 28.2,85.4 25.65,87.96 arc(25.54,88.12) 25.5,88.31 25.5,118.46 arc(25.54,118.65) 25.65,118.81 27.76,120.93 arc(27.92,121.04) 28.11,121.08 39.2,121.08 arc(39.39,121.11) 39.55,121.22 48.85,130.52 arc(48.96,130.69) 49,130.88 49,135.03 arc(48.96,135.22) 48.85,135.39 X1.12
DB6: length 95.3
  TOP w0.25: DD1.45 53.15,77.14 arc(53.11,77.33) 53,77.5 51.9,78.6 arc(51.73,78.71) 51.54,78.75 46.63,78.75 arc(46.43,78.79) 46.27,78.9 39.56,85.61 arc(39.4,85.72) 39.21,85.75 28.77,85.75 arc(28.57,85.79) 28.41,85.9 26.15,88.17 arc(26.04,88.33) 26,88.52 26,118.25 arc(26.04,118.45) 26.15,118.61 27.97,120.43 arc(28.13,120.54) 28.32,120.58 39.41,120.58 arc(39.6,120.61) 39.76,120.72 50.09,131.06 arc(50.2,131.22) 50.24,131.41 X1.13
DB7: length 98.9
  TOP w0.25: X1.14 51.36,135.42 arc(51.47,135.25) 51.51,135.06 51.51,131.97 arc(51.47,131.78) 51.36,131.62 39.97,120.22 arc(39.81,120.11) 39.62,120.08 28.53,120.08 arc(28.34,120.04) 28.18,119.93 26.65,118.4 arc(26.54,118.24) 26.5,118.05 26.5,88.73 arc(26.54,88.54) 26.65,88.37 28.62,86.4 arc(28.78,86.29) 28.97,86.25 39.42,86.25 arc(39.61,86.22) 39.77,86.11 46.48,79.4 arc(46.64,79.29) 46.83,79.25 52.04,79.25 arc(52.23,79.21) 52.4,79.1 53.8,77.7 arc(53.91,77.53) 53.95,77.34 DD1.44
DD+: length 19.1
  TOP w0.25: DD6.15 75.4,21.78 75.05,21.43 75.05,16.23 73.51,14.69 67.77,14.69 arc(67.58,14.65) 67.42,14.54 66.51,13.64 66.1,13.64 arc(65.9,13.6) 65.74,13.49 65.72,13.47 arc(65.56,13.37) 65.37,13.33 DD5.10
DD-: length 19.1
  TOP w0.25: DD6.16 75.13,22.43 74.55,21.85 arc(74.44,21.68) 74.4,21.49 74.4,16.5 73.24,15.34 67.3,15.34 66.24,14.29 66.07,14.29 arc(65.9,14.32) 65.76,14.41 65.72,14.45 arc(65.56,14.56) 65.37,14.6 DD5.11
E: length 107.4
  TOP w0.25: X1.6 41.2,135.42 arc(41.31,135.25) 41.35,135.06 41.35,133.52 arc(41.31,133.32) 41.2,133.16 36.69,128.65 arc(36.53,128.54) 36.34,128.5 26.96,128.5 arc(26.77,128.46) 26.61,128.35 22.15,123.89 arc(22.04,123.73) 22,123.54 22,83.69 arc(22.04,83.5) 22.15,83.33 29.24,76.24 arc(29.35,76.07) 29.39,75.88 29.39,75.26 29.39,68.14 arc(29.43,67.95) 29.53,67.78 32.23,65.09 arc(32.39,64.98) 32.59,64.94 38.23,64.94 arc(38.42,64.98) 38.58,65.09 40.4,66.9 arc(40.56,67.01) 40.75,67.05 DD1.58
JTAG.TCK: length 13.4
  TOP w0.25: DD1.57 39.06,67.85 arc(38.87,67.81) 38.7,67.7 37.9,66.9 arc(37.73,66.79) 37.54,66.75 X4.1
JTAG.TDI: length 17.7
  TOP w0.25: X4.9 37.85,75.06 arc(37.96,74.89) 38,74.7 38,71.71 arc(38.04,71.52) 38.15,71.35 39.1,70.4 arc(39.27,70.29) 39.46,70.25 DD1.54
JTAG.TDO: length 13
  TOP w0.25: DD1.55 37.33,69.45 arc(37.22,69.43) 37.13,69.37 arc(37.04,69.31) 36.94,69.29 X4.3
JTAG.TMS: length 18.4
  TOP w0.25: X4.5 34.9,70.73 arc(34.79,70.56) 34.75,70.37 34.75,68.81 arc(34.79,68.62) 34.9,68.45 35.15,68.2 arc(35.32,68.09) 35.51,68.05 37.59,68.05 arc(37.78,68.09) 37.95,68.2 38.25,68.5 arc(38.42,68.61) 38.61,68.65 DD1.56
K1: length 10.5
  TOP w0.25: RR1.1 70.75,84.01 v1(70.75,85.66) 70.75,89.24 arc(70.79,89.43) 70.9,89.59 RR2.8
  BOTTOM w0.25: SB1.4 70.32,82.68 arc(70.62,82.81) 70.75,83.11 v1(70.75,85.66)
K2: length 39.7
  TOP w0.25: v1(71.2,115.7) 72.51,114.39 arc(72.62,114.23) 72.66,114.04 v1(72.66,94) ; RR1.2 69.5,84.07 v1(69.5,86.75) 69.5,89.33 arc(69.53,89.5) RR2.7 69.64,89.65
  BOTTOM w0.25: v1(72.66,94) 72.66,88.86 arc(72.62,88.67) 72.51,88.51 70.9,86.9 arc(70.73,86.79) 70.54,86.75 v1(69.5,86.75) ; SB7.4 v1(71.2,115.7)
K3: length 22
  TOP w0.25: v1(71.25,99.19) v1(71.25,95.75) ; 68.17,84 68.21,84.05 v1(68.21,87.82) 68.21,89.29 arc(68.25,89.48) 68.36,89.64 RR2.6
  BOTTOM w0.25: v1(71.25,95.75) 71.25,88.96 arc(71.21,88.77) 71.1,88.6 70.46,87.96 arc(70.3,87.85) 70.11,87.82 v1(68.21,87.82) ; SB4.4 v1(71.25,99.19)
K4: length 49.9
  TOP w0.25: 66.84,84 66.85,84.01 arc(66.96,84.17) 67,84.37 v1(67,86.5) 67,89.61 RR2.5 ; v1(49.75,113.75) 63.04,113.75 arc(63.23,113.71) 63.4,113.6 65.85,111.15 arc(65.96,110.98) 66,110.79 66,96.96 arc(66.04,96.77) 66.15,96.6 v1(66.75,96)
  BOTTOM w0.25: v1(67,86.5) 66.9,86.6 arc(66.79,86.77) 66.75,86.96 v1(66.75,96) ; SB8.4 v1(49.75,113.75)
K5: length 65.6
  TOP w0.25: RR4.1 64.75,84.01 v1(64.75,87.75) 64.75,89.7 RR3.8 ; v1(64.75,94.25) 64.75,110.04 arc(64.71,110.23) 64.6,110.4 62.9,112.1 arc(62.73,112.21) 62.54,112.25 32.44,112.25 arc(32.25,112.29) 32.09,112.4 v1(30.73,113.75)
  BOTTOM w0.25: SB9.4 v1(30.73,113.75) ; v1(64.75,94.25) v1(64.75,87.75)
K6: length 31.9
  TOP w0.25: v1(63.48,95.98) 51.23,95.98 arc(51.03,96.02) 50.87,96.13 v1(49.75,97.25) ; RR3.7 63.48,89.66 v1(63.48,86) 63.48,84.05 RR4.2
  BOTTOM w0.25: v1(63.48,86) v1(63.48,95.98) ; SB5.4 v1(49.75,97.25)
K7: length 46.9
  TOP w0.25: v1(62.25,94.25) 33.94,94.25 arc(33.75,94.29) 33.59,94.4 v1(30.73,97.25) ; RR3.6 arc(62.23,89.61) 62.25,89.5 v1(62.25,87.75) 62.25,84.21 arc(62.23,84.1) RR4.3
  BOTTOM w0.25: SB6.4 v1(30.73,97.25) ; v1(62.25,94.25) v1(62.25,87.75)
K8: length 19
  TOP w0.25: RR3.5 60.84,85.4 ; 60.84,85.4 50.86,85.4 arc(50.67,85.37) 50.51,85.26 v1(49.75,84.5) ; 60.84,85.4 RR4.4
  BOTTOM w0.25: SB2.4 v1(49.75,84.5)
K9: length 32.7
  TOP w0.25: R14.1 R12.2 56.95,89.5 arc(56.76,89.54) 56.6,89.65 54.15,92.1 arc(53.98,92.21) 53.79,92.25 v1(30.73,92.25)
  BOTTOM w0.25: SB3.2 v1(30.73,92.25)
KEY1: length 10.4
  TOP w0.25: RR1.8 70.75,80.7 arc(70.72,80.51) 70.61,80.35 67.77,77.51 arc(67.66,77.35) 67.62,77.16 67.62,75.78 arc(67.59,75.59) 67.48,75.43 65.65,73.6 arc(65.49,73.49) 65.3,73.45 DD1.31
KEY2: length 8.8
  TOP w0.25: RR1.7 69.44,80.31 arc(69.41,80.19) 69.34,80.09 69.25,80 67.15,77.89 arc(67.04,77.72) 67,77.53 67,76.46 arc(66.96,76.27) 66.85,76.1 65.15,74.4 arc(64.98,74.29) 64.79,74.25 DD1.32
KEY3: length 8.1
  TOP w0.25: DD1.33 63.05,76 arc(63.24,76.04) 63.4,76.15 66.11,78.86 arc(66.27,78.97) 66.46,79 67.5,79 67.75,79.25 67.75,79.3 68.1,79.66 arc(68.21,79.82) 68.25,80.01 68.25,80.6 arc(68.23,80.71) 68.17,80.8
KEY4: length 7.9
  TOP w0.25: DD1.34 61.95,76.8 arc(61.99,76.99) 62.1,77.15 62.6,77.66 arc(62.77,77.77) 62.96,77.8 63.69,77.8 arc(63.88,77.84) 64.05,77.95 65.55,79.46 arc(65.72,79.57) 65.91,79.6 66.5,79.6 66.75,79.85 66.75,79.88 66.84,79.98 66.84,80.8
KEY5: length 6.8
  TOP w0.25: RR4.8 64.75,79.98 64.75,79.97 64.75,79.8 63.5,78.55 arc(63.33,78.44) 63.14,78.4 62.66,78.4 arc(62.47,78.37) 62.3,78.26 61.3,77.25 arc(61.19,77.09) 61.15,76.9 DD1.35
KEY6: length 6
  TOP w0.25: DD1.36 60.35,76.9 arc(60.39,77.09) 60.5,77.25 63.29,80.04 arc(63.4,80.2) 63.44,80.4 RR4.7
KEY7: length 5.8
  TOP w0.25: RR4.6 62.16,80.18 arc(62.13,79.99) 62.02,79.83 59.7,77.51 arc(59.59,77.35) 59.55,77.15 DD1.37
KEY8: length 5.6
  TOP w0.25: RR4.5 60.84,80.18 arc(60.81,79.99) 60.7,79.83 58.9,78.03 arc(58.79,77.87) 58.75,77.67 DD1.38
KEY9: length 8.1
  TOP w0.25: R14.2 58,80.05 57.95,80 DD1.39
LED: length 56.1
  TOP w0.25: R6.2 73.25,122.9 arc(73.44,122.87) 73.6,122.76 73.85,122.5 arc(73.96,122.34) 74,122.15 74,121.88 arc(74.03,121.71) 74.13,121.57 arc(74.22,121.43) 74.25,121.27 74.25,81.21 arc(74.21,81.02) 74.1,80.86 66.04,72.8 arc(65.88,72.69) 65.69,72.65 DD1.30
LRST: length 97.4
  TOP w0.25: X1.17 55.32,133.1 arc(55.28,132.91) 55.17,132.75 40.57,118.15 arc(40.41,118.04) 40.22,118 29.71,118 arc(29.52,117.97) 29.35,117.86 28.4,116.9 arc(28.29,116.74) 28.25,116.55 28.25,89.71 arc(28.29,89.52) 28.4,89.36 29.49,88.26 arc(29.65,88.15) 29.84,88.12 40.66,88.12 arc(40.7,88.1) 40.72,88.05 40.72,87.99 47.31,81.4 arc(47.48,81.29) 47.67,81.25 53.29,81.25 arc(53.48,81.22) 53.65,81.11 57,77.75 arc(57.11,77.59) 57.15,77.4 DD1.40
MUX: length 55.2
  TOP w0.25: DD1.29 65.85,71.85 arc(66.04,71.89) 66.2,72 72.53,78.33 arc(72.62,78.38) 72.71,78.4 80.25,78.4 arc(80.34,78.38) 80.42,78.33 81.6,77.15 arc(81.71,76.98) 81.75,76.79 81.75,54.21 arc(81.71,54.02) 81.6,53.86 77.64,49.9 arc(77.48,49.79) 77.29,49.75 DD2.1
R_W: length 104.6
  TOP w0.25: X1.5 40.08,133.16 arc(40.04,132.96) 39.93,132.8 36.28,129.15 arc(36.12,129.04) 35.92,129 26.84,129 arc(26.75,128.99) 26.67,128.97 26.4,128.85 21.65,124.1 arc(21.54,123.94) 21.5,123.75 21.5,83.48 arc(21.54,83.29) 21.65,83.12 28.74,76.03 arc(28.85,75.87) 28.89,75.68 28.89,67.93 arc(28.93,67.74) 29.03,67.58 32.02,64.59 arc(32.19,64.48) 32.38,64.44 38.73,64.44 arc(38.92,64.48) 39.09,64.59 40.6,66.1 arc(40.76,66.21) 40.96,66.25 DD1.59
RXD0/MOSI: length 26
  TOP w0.25: 40.75,53.25 40.35,52.85 arc(40.24,52.69) 40.2,52.5 40.2,49.61 arc(40.16,49.42) 40.05,49.26 39.4,48.6 arc(39.23,48.49) 39.04,48.45 VD2.1 ; 40.75,53.25 41.05,53.56 arc(41.16,53.72) 41.2,53.91 R1.1 ; 40.75,53.25 46.05,53.25 arc(46.24,53.29) 46.4,53.4 51.4,58.4 arc(51.51,58.57) 51.55,58.76 DD1.2 ; 40.75,53.25 VD1.1
RXD1: length 67.5
  TOP w0.25: DD2.12 v1(69.21,46.5) ; v1(65,46.42) 65,49.5 arc(65.04,49.69) 65.15,49.85 67.65,52.36 arc(67.81,52.46) 68,52.5 78.09,52.5 arc(78.28,52.54) 78.44,52.65 80.35,54.56 arc(80.46,54.72) 80.5,54.92 80.5,76.29 arc(80.46,76.48) 80.35,76.65 80.17,76.83 arc(80.09,76.88) 80,76.9 73.07,76.9 arc(72.97,76.88) 72.89,76.83 66.46,70.4 arc(66.3,70.29) 66.11,70.25 DD1.27
  BOTTOM w0.25: v1(69.21,46.5) 68.09,46.5 68.01,46.42 v1(65,46.42)
RXD_LS: length 69.3
  TOP w0.25: DD2.13 69.84,43.3 arc(69.81,43.11) 69.7,42.95 67.9,41.15 arc(67.79,40.98) 67.75,40.79 67.75,39 arc(67.6,38.65) 67.25,38.5 24.66,38.5 arc(24.47,38.54) 24.31,38.65 13.15,49.81 arc(13.04,49.97) 13,50.16 R11.1
SCK: length 20.8
  TOP w0.25: 50.63,47.5 50.63,49.42 arc(50.67,49.61) 50.78,49.78 52.16,51.16 arc(52.32,51.27) 52.51,51.3 58.19,51.3 arc(58.38,51.34) 58.55,51.45 59.85,52.76 arc(59.96,52.92) 60,53.11 60,57.04 arc(59.96,57.23) 59.85,57.4 58.9,58.35 arc(58.79,58.52) 58.75,58.71 DD1.11
SCL: length 15.7
  TOP w0.25: DD1.25 66.44,68.65 arc(67.1,68.78) 67.65,69.15 71.43,72.93 arc(71.51,72.98) 71.61,73 75.72,73 arc(75.91,73.04) 76.07,73.15 76.62,73.7 arc(76.73,73.86) 76.77,74.05 DD4.2
SDA: length 14.1
  TOP w0.25: DD1.26 66.53,69.45 arc(66.72,69.49) 66.89,69.6 70.65,73.36 arc(71.03,73.61) 71.48,73.7 75.25,73.7 arc(75.43,73.77) 75.5,73.95 DD4.1
TXD0/MISO: length 26.4
  TOP w0.25: R10.1 38.89,45.2 arc(39.08,45.24) 39.25,45.35 41.25,47.36 arc(41.42,47.47) 41.61,47.5 48.09,47.5 48.09,53.89 arc(48.13,54.08) 48.24,54.24 48.46,54.46 52.2,58.2 arc(52.31,58.37) 52.35,58.56 DD1.3
TXD1: length 64.6
  TOP w0.25: DD1.28 66.2,71.05 arc(66.39,71.09) 66.55,71.2 72.88,77.53 arc(72.97,77.58) 73.06,77.6 80,77.6 arc(80.1,77.58) 80.18,77.53 80.85,76.85 arc(80.96,76.69) 81,76.5 81,54.71 arc(80.96,54.52) 80.85,54.35 78.65,52.15 arc(78.48,52.04) 78.29,52 68.21,52 arc(68.02,51.96) 67.86,51.86 66.15,50.15 arc(66.04,49.98) 66,49.79 66,45.66 arc(66.04,45.47) 66.15,45.3 66.65,44.8 arc(66.82,44.69) 67.01,44.65 DD2.9
TXD_LS: length 60
  TOP w0.25: R13.1 17,50.46 arc(17.04,50.27) 17.15,50.1 26.6,40.65 arc(26.76,40.54) 26.95,40.5 63.05,40.5 arc(63.24,40.54) 63.4,40.65 65.1,42.35 arc(65.27,42.46) 65.46,42.5 66.79,42.5 arc(66.98,42.54) 67.15,42.65 67.79,43.29 arc(67.9,43.46) 67.94,43.65 DD2.10
N00957: length 9.2
  TOP w0.25: R2.1 47.29,55.5 arc(47.48,55.54) 47.65,55.65 50.6,58.61 arc(50.71,58.77) 50.75,58.96 DD1.1
N01084: length 6.9
  TOP w0.4: DD1.8 56.35,59.56 arc(56.31,59.37) 56.2,59.2 TP1.1
N01088: length 5.3
  TOP w0.4: DD1.9 57.15,57.8 57.25,57.7 TP2.1
N01310: length 14
  TOP w0.4: C3.1 75.34,70.45 arc(75.15,70.42) 74.98,70.31 74.82,70.15 arc(74.66,70.04) 74.47,70 ZQ1.2 71.25,68 arc(71.08,67.89) 70.89,67.85 DD1.24
N01324: length 14.1
  TOP w0.4: DD1.23 70.99,67.05 arc(71.18,67.01) 71.35,66.9 ZQ1.1 74.47,65 arc(74.66,64.96) 74.82,64.85 75.38,64.3 arc(75.54,64.19) 75.73,64.15 C2.1
N93659: length 19.4
  TOP w0.25: X1.3 37.54,132.5 arc(37.39,132.15) 37.04,132 R4.3 R4.2
N93746: length 35.4
  TOP w0.25: X1.18 54.01,137.85 arc(53.84,137.96) 53.65,138 36.75,138 arc(36.4,137.85) 36.25,137.5 36.25,135.75 arc(36.1,135.4) 35.75,135.25 30.21,135.25 arc(30.02,135.29) 29.85,135.4 28.4,136.85 arc(28.23,136.96) 28.04,137 R4.1
N93998: length 16.1
  TOP w0.5: 65,132 60.61,136.39 arc(60.44,136.5) 60.25,136.54 X1.20 ; 65,132 R5.1 ; 65,132 arc(64.93,131.89) 64.9,131.76 VT1.3
N94028: length 5.8
  TOP w0.25: R6.1 R7.2 68.95,126 68.94,126 VT1.1
N94170: length 10.8
  TOP w0.5: v1(66.6,134) 66.6,135.76 arc(66.63,135.89) R3.1
  BOTTOM w0.5: v1(66.6,134) X1.19
N100167: length 6
  TOP w0.25: DD2.11 68.58,42.98 arc(68.54,42.79) 68.43,42.63 67.7,41.9 arc(67.54,41.79) 67.35,41.75 67.2,41.75 arc(67.01,41.72) 66.85,41.61 66.15,40.9 arc(66.04,40.74) 66,40.55 R18.2
N100189: length 4.8
  TOP w0.25: R16.2 70,42.04 arc(70.04,42.23) 70.15,42.4 70.33,42.58 arc(70.44,42.75) 70.48,42.94 DD2.14
N115270: length 6.2
  TOP w0.25: DD5.7 53.71,13.33 53.47,13.09 53.17,13.09 52.27,12.19 C22.2 49.94,11.97 arc(49.75,11.93) 49.58,11.82 R25.2
N115278: length 6.1
  TOP w0.25: R24.2 49.6,14.04 arc(49.77,13.93) 49.96,13.89 C23.2 51.75,13.74 53.2,13.74 54.06,14.6 DD5.6
N115358: length 2.2
  TOP w0.5: FB1.1 46.5,24.29 arc(46.54,24.48) 46.65,24.65 X5.1
N115370: length 2.3
  TOP w0.5: X5.4 40.35,24.45 arc(40.46,24.28) 40.5,24.09 FB2.1
N115422: length 2.8
  TOP w0.25: TV1.1 43.1,23.99 arc(43.06,24.18) 42.95,24.35 X5.3
N115426: length 2.7
  TOP w0.25: X5.2 44.05,24.55 arc(43.94,24.38) 43.9,24.19 TV1.4
N115490: length 9
  TOP w0.25: 65.8,17.14 66,17.34 ; 65.8,17.14 66,16.94 66,16.14 arc(65.92,15.95) 65.73,15.87 DD5.12 ; 65.8,17.14 65.65,17.14 65.65,17.14 DD5.13 ; 66,17.34 66.25,17.59 arc(66.42,17.7) 66.61,17.74 C17.1 ; 66,17.34 66,18.14 arc(65.92,18.33) 65.73,18.41 DD5.14
N115638: length 8.6
  TOP w0.25: 53.4,17.34 53.27,17.47 arc(53.19,17.52) 53.09,17.54 C19.1 ; 53.4,17.34 53.4,17.75 arc(53.44,17.94) 53.55,18.11 53.7,18.26 arc(53.86,18.37) 54.05,18.41 DD5.3 ; 53.4,17.34 53.6,17.14 ; 53.6,17.14 53.4,16.94 53.4,16.14 arc(53.48,15.95) 53.67,15.87 DD5.5 ; 53.6,17.14 DD5.4
N116441: length 6.8
  TOP w0.25: R16.1 R26.1 DD6.1
N116513: length 2.5
  TOP w0.25: DD6.17 78.03,23.08 78.3,22.81 78.3,22.7 78.5,22.5 C11.1
N116637: length 12.9
  TOP w0.25: DD6.5 66.96,27.63 arc(66.77,27.67) 66.6,27.77 66.15,28.23 arc(66.04,28.39) 66,28.59 R18.1
N116697: length 6.4
  TOP w0.25: DD6.22 77.98,26.33 arc(78.17,26.37) 78.33,26.47 78.45,26.59 arc(78.62,26.7) 78.81,26.74 82,26.74 arc(82.28,26.86) 82.4,27.14 VD4.C
N116729: length 3.3
  TOP w0.25: DD6.23 77.83,26.98 arc(78.02,27.02) 78.18,27.12 78.65,27.59 arc(78.82,27.7) 79.01,27.74 VD3.C
N116753: length 1.9
  TOP w0.25: VD3.A R20.1
N116773: length 1.9
  TOP w0.25: VD4.A R21.1
N134788: length 11.1
  TOP w0.5: 33.4,21.3 33.35,21.25 31.71,21.25 arc(31.52,21.22) 31.35,21.11 30.9,20.65 arc(30.79,20.49) 30.75,20.3 C21.2 ; 33.4,21.3 34.14,22.04 arc(34.3,22.15) 34.49,22.19 X5.5 ; 33.4,21.3 R27.1
N164718: length 3.9
  TOP w0.4: AV1.1 55.41,5.59 arc(55.22,5.55) 55.06,5.44 54.81,5.19 arc(54.65,5.08) 54.45,5.05 R28.2
N166181: length 9
  TOP w0.25: R30.1 77.71,16.84 arc(77.52,16.8) 77.35,16.69 73.65,12.99 arc(73.54,12.82) 73.5,12.63 DD7.4
N168079: length 2.4
  TOP w0.25: R31.2 71.96,8.09 arc(72,8.28) 72.11,8.44 72.4,8.74 arc(72.51,8.9) 72.55,9.1 DD7.2
N169875: length 12.9
  TOP w0.25: DD6.19 77.97,24.38 arc(78.16,24.34) 78.32,24.23 78.47,24.09 arc(78.63,23.98) 78.82,23.94 82.39,23.94 arc(82.58,23.9) 82.75,23.79 83.25,23.29 arc(83.36,23.12) 83.4,22.93 83.4,20.75 arc(83.36,20.56) 83.25,20.39 82.85,19.99 arc(82.68,19.88) 82.49,19.84 R30.2
N170831: length 9.3
  TOP w0.25: R31.1 R29.1 66.36,4.42 66.26,4.32 62.69,4.32
N172116: length 34.6
  TOP w0.25: VD2.3 36.05,47.39 arc(36.02,47.26) 35.95,47.15 arc(35.88,47.04) 35.85,46.91 35.85,44.16 arc(35.89,43.97) 36,43.81 36.45,43.35 arc(36.62,43.24) 36.81,43.2 51.4,43.2 arc(51.75,43.35) 51.9,43.7 51.9,48.2 arc(51.94,48.39) 52.05,48.55 52.45,48.96 arc(52.62,49.07) 52.81,49.1 57.49,49.1 arc(57.69,49.07) 57.85,48.96 58.1,48.7 arc(58.21,48.54) 58.25,48.35 58.25,47.5
N172976: length 25.3
  TOP w0.25: R9.2 24.71,51.75 arc(24.52,51.79) 24.35,51.9 22.3,53.95 arc(22.14,54.06) 21.95,54.1 12.36,54.1 arc(12.17,54.14) 12.01,54.25 10.15,56.11 arc(10.04,56.27) 10,56.46 X2.1
N172980: length 9.8
  TOP w1: X2.4 X2.2 10,67.66 arc(9.97,67.83) 9.87,67.97 arc(9.78,68.11) 9.75,68.27 L1.2
N173418: length 34.3
  TOP w0.25: X2.5 15.08,55.63 arc(15.12,55.44) 15.23,55.28 15.45,55.05 arc(15.62,54.94) 15.81,54.9 24.9,54.9 arc(25.09,54.86) 25.25,54.75 26.85,53.15 arc(26.96,52.99) 27,52.8 27,49.46 arc(27.04,49.27) 27.15,49.11 30.9,45.35 arc(31.07,45.24) 31.26,45.2 R10.2
N173516: length 8.4
  TOP w0.25: X2.3 12.54,57.57 arc(12.58,57.38) 12.69,57.22 12.85,57.05 arc(12.96,56.89) 13,56.7 R11.2
N173528: length 8.5
  TOP w0.25: X2.7 17.62,57.73 arc(17.58,57.54) 17.47,57.38 17.15,57.05 arc(17.04,56.89) 17,56.7 R13.2
N177903: length 8.6
  TOP w0.25: R9.1 32.29,51.75 arc(32.48,51.79) 32.65,51.9 34.85,54.11 arc(35.02,54.22) 35.21,54.25 36,54.25 VD1.3

## Copper pours and planes (outline as drawn; the poured copper is in the pictures)
GND on TOP: 63.5,2.2 63.5,6.72 61.36,6.72 61.36,10.72 63.5,10.72 63.5,37.6 2.1,37.6 2.1,141.9 84.9,141.9 84.9,2.2 ; 12 cut-outs
GND on BOTTOM: 63.5,2.2 63.5,37.6 2.1,37.6 2.1,141.9 84.9,141.9 84.9,2.2
GNDE on TOP: 56,29 56,10.72 58.16,10.72 58.16,6.72 56,6.72 56,2.2 25,2.2 25,29
GNDE on BOTTOM: 56,29 56,2.2 25,2.2 25,29
+5B on TOP: 82.5,39 82.5,126.3 80.3,128.5 73,128.5 72,129.5 72,137 69.9,139.1 15.4,139.01 15.4,129.5 14.4,128.5 7.2,128.5 5,126.3 5,84.75 6.5,84.75 6.5,71.4 2.1,71.4 2.1,141.9 84.9,141.9 84.9,39
+5B on TOP: 48.3,75 48.3,59.8 63.4,59.8 63.7,75.1

## Text on the board
Ref Des/Assembly Top: ProSoft-Systems | 3.140.009 | BSP-PI_03v3 rev0 | November 2015
Ref Des/Silkscreen Top: ProSoft-Systems | 3.140.009 | BSP-PI_03v3 rev0 | November 2015 | BSP | JTAG | LCD | ISP
DEVICE_TYPE_BOTTOM: FIGURE | SIZE | 0.5 | 1.0 | 1.1 | 1.2 | 2.5 | 3.2 | BY LAYER: TOP to BOTTOM | ALL UNITS ARE IN MILLIMETERS | PLATED | QTY | 164 | 50 | 5 | 4 | 2
